# Altium PCB ecg.PcbDoc
Units mm, origin at the board's own origin, x right, y up, seen from the top; angles counter-clockwise.
Board outline 72.9 x 46.1 mm, 2 copper layers (Top Layer, Bottom Layer); 29 components, 18 nets, 75 pads, 21 vias.
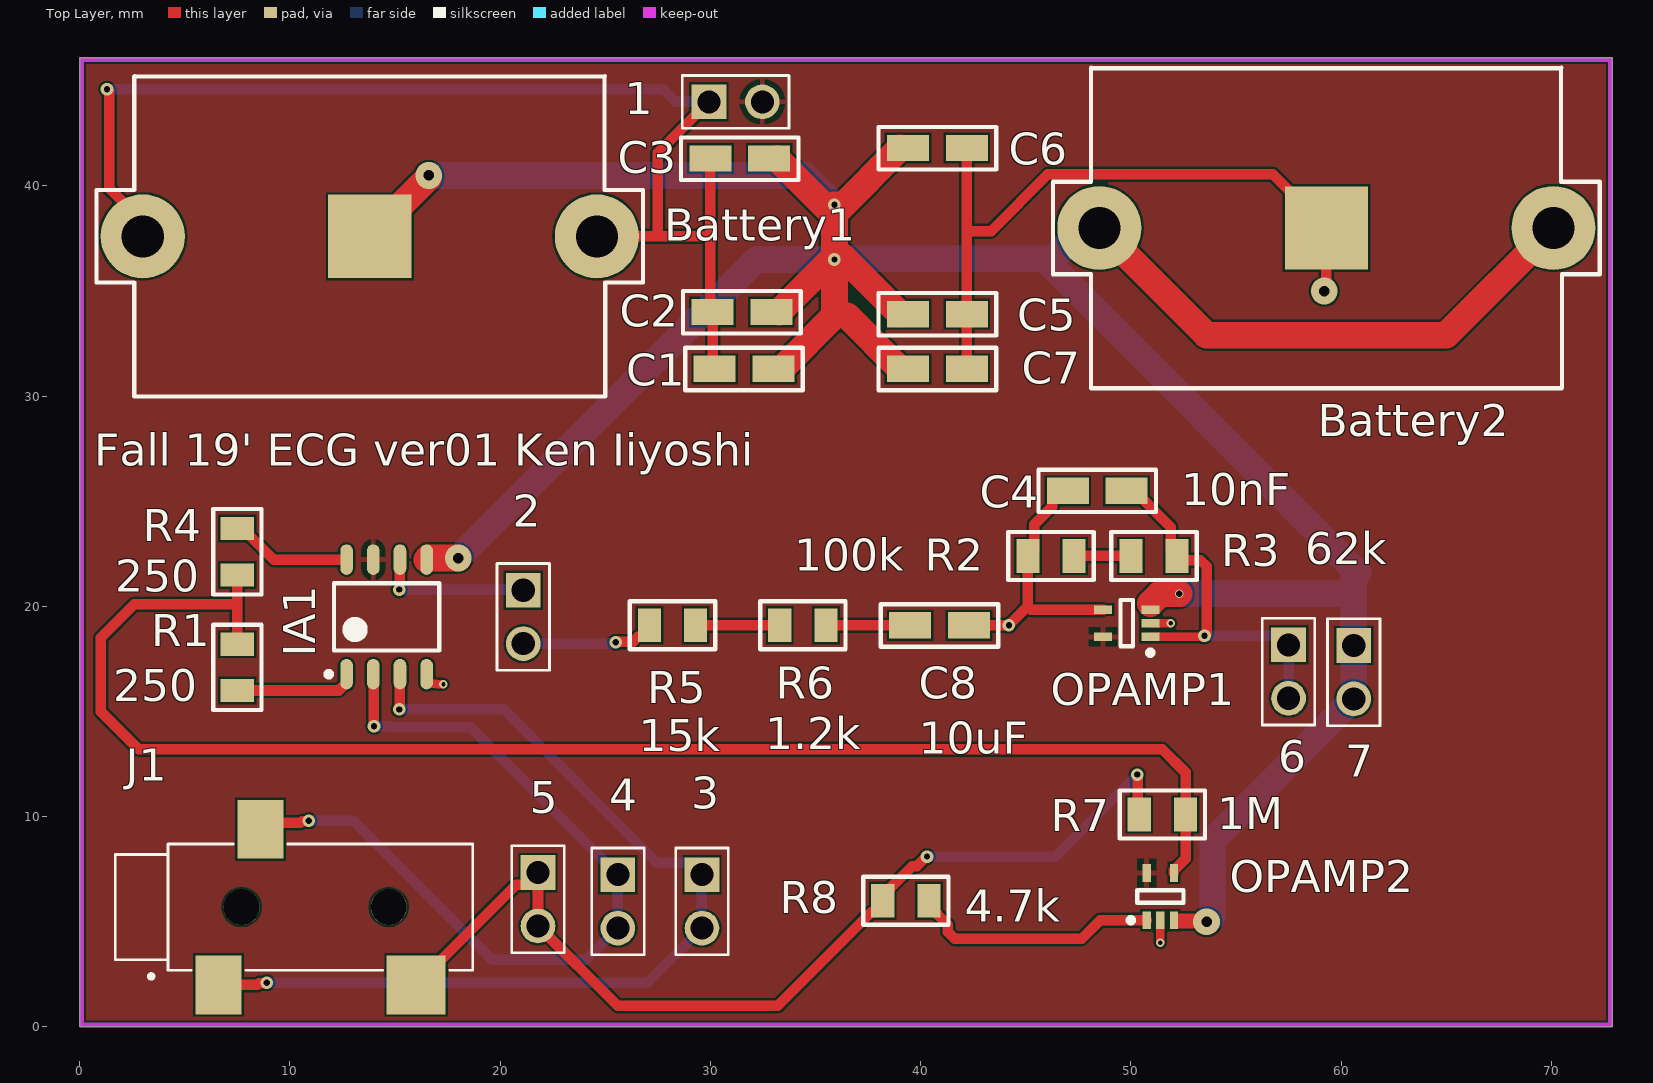
[diagram p0: Top Layer view]
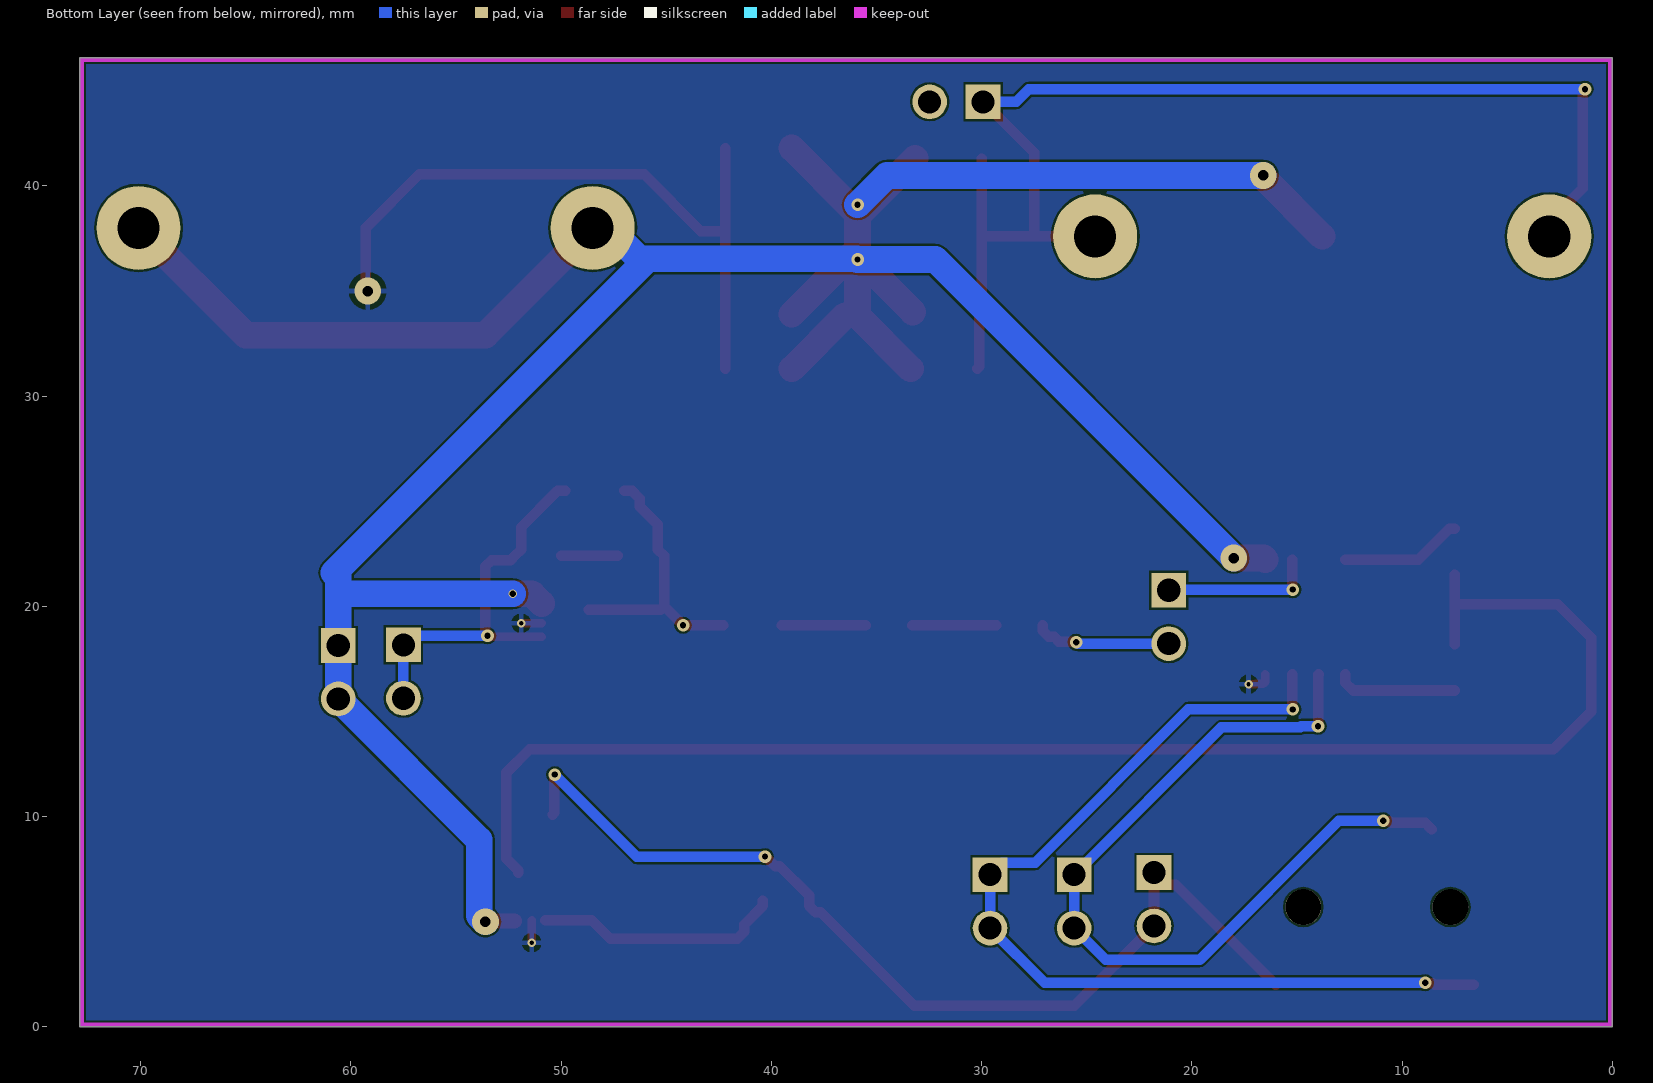
[diagram p1: Bottom Layer view, seen from below]
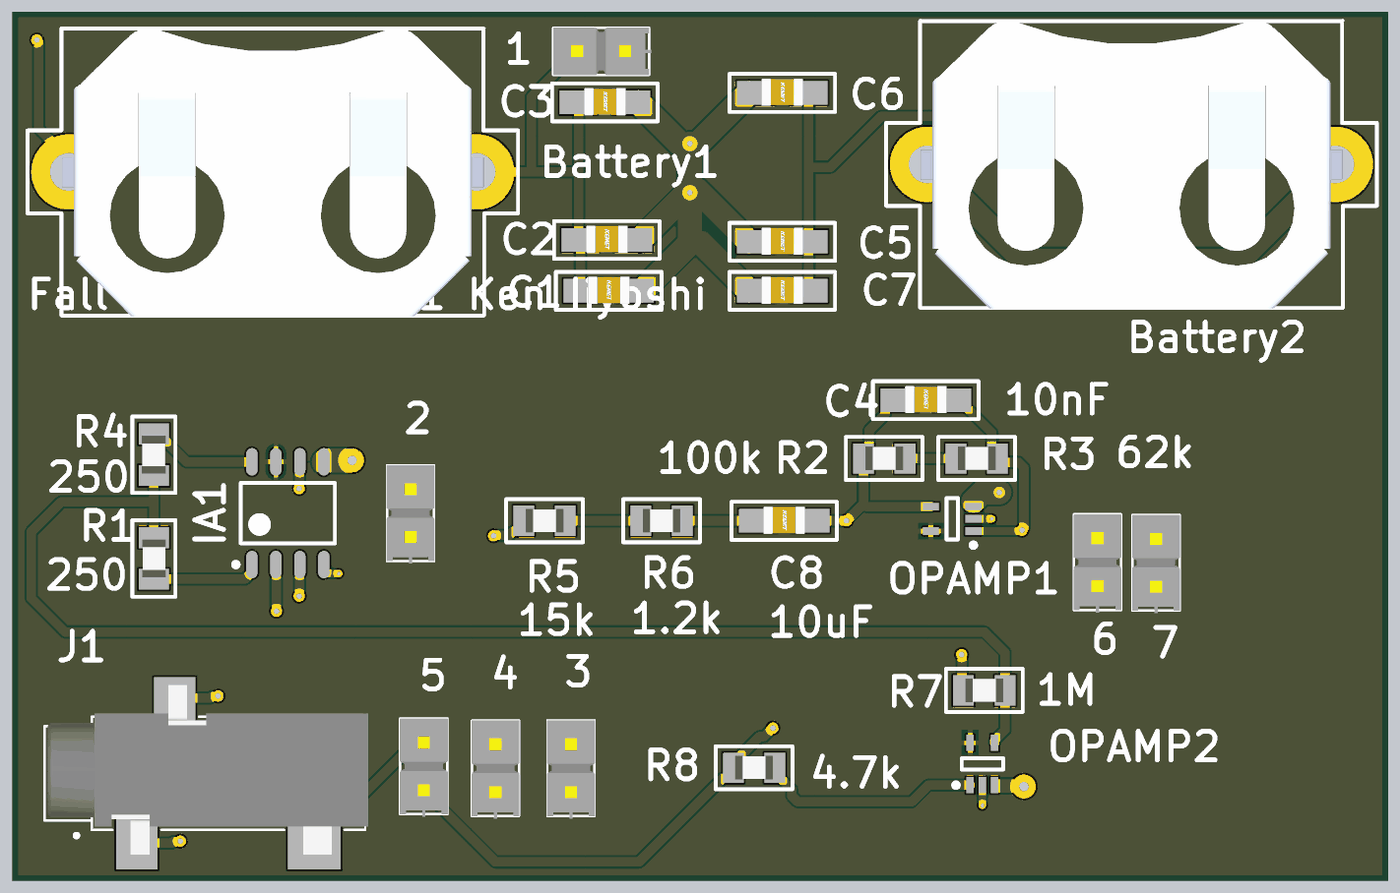
[diagram p2: 3D render of the assembled board from above, using the file's embedded part models]

## Layer stack, top to bottom
Top Solder: solder mask 0.0102, Solder Resist, Dk 3.5
Top Layer: signal copper 0.0356
Dielectric 1: dielectric 0.32, FR-4, Dk 4.8
Bottom Layer: signal copper 0.0356
Bottom Solder: solder mask 0.0102, Solder Resist, Dk 3.5

## Board outline
72.9,0 72.9,46.1 0,46.1 0,0

## Design rules (kind name [scope] priority, off if disabled: settings)
Clearance [All] p1: gap=0.1 ignorepadtopadclearanceinfootprint=FALSE
PolygonConnect [All] p1: connectstyle=Relief reliefconductorwidth=0.254 reliefentries=4 polygonreliefangle="90 Angle" airgapwidth=0.254
RoutingVias [All] p1: holewidth=0.3 width=0.4 viastyle="Through Hole" minholewidth=0.2 minwidth=0.4 maxholewidth=1 maxwidth=1.27
SMDNeckDown [All] p1: percent=500.000
SilkToSilkClearance [All] p1: silktosilkclearance=0.025
SilkToSolderMaskClearance [IsPad] p1: minsilkscreentomaskgap=0.025 clearancetoexposedcopper=TRUE
SolderMaskExpansion [All] p1: expansion=0.102
Width [All] p1: maxlimit=100 minlimit=0.254 preferedwidth=0.254
28 further rules are at their usual default settings.

## Components (designator, comment, footprint, x,y, rotation, side; value= is the part's Value field where it differs from the comment)
1 "2_headers" 3M_961102-6404-AR 31.2,44 r0 top
2 "2_headers" 3M_961102-6404-AR 21.1,19.5 r270 top
3 "2_headers" 3M_961102-6404-AR 29.6,5.97 r270 top
4 "2_headers" 3M_961102-6404-AR 25.6,5.97 r270 top
5 "2_headers" 3M_961102-6404-AR 21.8,6.07 r270 top
6 "2_headers" 3M_961102-6404-AR 57.5,16.9 r270 top
7 "2_headers" 3M_961102-6404-AR 60.6,16.87 r270 top
Battery1 "3V Battery" "Battery Retainer" 13.8,37.6 r0 top
Battery2 "3V Battery" "Battery Retainer" 59.3,38 r0 top
C1 "1 nF" Capacitor 31.6,31.3 r0 top
C2 "100 nF" Capacitor 31.5,34 r0 top
C3 "10 uF" Capacitor 31.4,41.3 r0 top
C4 "10 nF" Capacitor 48.4,25.5 r0 top
C5 "100 nF" Capacitor 40.8,33.9 r0 top
C6 "10 uF" Capacitor 40.8,41.8 r0 top
C7 "1 nF" Capacitor 40.8,31.3 r0 top
C8 "10 uF" Capacitor 40.9,19.1 r0 top
IA1 "provided IA" SOIC127P600X175-8N 14.6,19.5 r90 top
J1 "Audio Jack" CUI_SJ-3523-SMT-TR 7.7,5.7 r0 top
OPAMP1 "provided opamp" SOT65P210X110-5N 49.8,19.2 r180 top
OPAMP2 "provided opamp" SOT65P210X110-5N 51.4,6.2 r90 top
R1 "250 Ohms" Resistor 7.5,17.1 r270 top
R2 "100 kOhms" Resistor 46.2,22.4 r0 top
R3 "62 kOhms" Resistor 51.1,22.4 r0 top
R4 "250 Ohms" Resistor 7.5,22.6 r90 top
R5 "15 kOhms" Resistor 28.2,19.1 r0 top
R6 "1.2 kOhms" Resistor 34.4,19.1 r0 top
R7 "1 MOhms" Resistor 51.5,10.1 r0 top
R8 "4.7 kOhms" Resistor 39.3,6 r0 top

## Footprints (in the part's own frame and the unit in brackets; to place one, negate y for a bottom-side part, rotate by r counter-clockwise, add the part's x,y. Pads: shape width x height; smd on the part's side, far side on the other; paste and mask are expansions set on the pad)
3M_961102-6404-AR [mm]
  rect 1.65x1.65 hole 1.1: 1(-1.27,0)
  round 1.65 hole 1.1: 2(1.27,0)
  silkscreen extent -2.54,-1.25 2.54,1.25, body extent -2.54,-1.27 2.67,1.27, height 7.89
"Battery Retainer" [mm]
  round 4 hole 2: 1(-10.8,0) 1(10.8,0)
  rect 3.96x3.96 smd: 2(0,0)
  silkscreen extent -13,-7.62 13,7.62, body extent -11.18,-7.67 11.17,7.62, height 4.27
Capacitor [mm]
  rect 2x1.25 smd: 1(-1.397,0) 2(1.397,0)
  silkscreen extent -2.8,-1.02 2.79,1, body extent -1.1,-0.7 1.1,0.75, height 0.89
CUI_SJ-3523-SMT-TR [mm] "SJ-352x-SMT"
  rect 2.2x2.8 smd: 1(-1.1,-3.7) 3(0.9,3.7)
  rect 2.8x2.8 smd: 2(8.3,-3.7)
  round 1.7 hole 1.7 unplated: None(0,0) None(7,0)
  silkscreen extent -6,-3.4 11,3, body extent -5.83,-4.32 11.17,4.68, height 5.01
Resistor [mm]
  rect 1.1x1.6 smd: 1(-1.1,0) 2(1.1,0)
  silkscreen extent -2.03,-1.14 2.03,1.14, body extent -1,-0.63 1,0.64, height 0.47
SOIC127P600X175-8N [mm] "SOIC, 8-Leads, Body 4.90x3.90mm, Pitch 1.27mm, IPC Medium Density"
  oval 1.45x0.6 smd: 1(-2.725,1.905) 2(-2.725,0.635) 3(-2.725,-0.635) 4(-2.725,-1.905) 5(2.725,-1.905) 6(2.725,-0.635) 7(2.725,0.635) 8(2.725,1.905)
  silkscreen extent -2.85,-2.5 1.6,2.88, body extent -2,-2.5 2,2.5, height 1.75
SOT65P210X110-5N [mm] "SOT23, 5-Leads, Body 2.00x2.10mm, Pitch 0.65mm, IPC Medium Density"
  rect 0.85x0.4 smd: 1(-1.125,0.65) 2(-1.125,0) 3(-1.125,-0.65) 4(1.125,-0.65) 5(1.125,0.65)
  silkscreen extent -1.25,-1.1 0.3,1.52, body extent -0.7,-1.07 0.7,1.08, height 1.1

## Part data
1 2 3 4 5 6 7: library part 961102-6404-AR, "BOARD TO BOARD, HEADER, 2POS, 1ROW; Series: 961; Pitch Spacing: 2.54mm; No. of Row", Package=None, Digi-Key_Part_Number=3M9457-02-ND, Digi-Key_Purchase_URL=https://www.digikey.com/product-detail/en/3m/961102-6404-AR/3M9457-02-ND/7104633?utm_source=snapeda&utm_medium=aggregator&utm_campaign=symbol, MF=3M, MP=961102-6404-AR, SnapEDA_Link=https://www.snapeda.com/parts/961102-6404-AR/3M%20%28TC%29/view-part/?ref=snap
Battery1 Battery2: library part BC-2003-G-TR, "Battery Retainer Coin, 20.0mm 1 Cell SMD (SMT) Tab", Manufacturer 1="Memory Protection Devices", Supplier Part Number 1=BC-2003-G-TR-CT-ND, Manufacturer Part Number 1=BC-2003-G-TR, Pricing 1="1=0.95000, 10=0.80500, 100=0.66510, 500=0.57498 (USD)", RoHS=No, Stock 1=4670, Supplier 1=Digi-Key
C1 C2 C3 C4 C5 C6 C7 C8: library part 08051A300JAT2A, "CAP CER 30PF 100V C0G/NP0 0805", Capacitance=30pF, Case/Package=0805, Case Code (Metric)=2012, Dielectric=C0G, Dielectric Material=Ceramic, Manufacturer 1="Kyocera AVX", Max Operating Temperature=125°C, Min Operating Temperature=-55°C, Package Quantity=4000, Supplier Part Number 1=478-3738-1-ND, Temperature Coefficient=30ppm/°C, Tolerance=5%, Voltage=100V, Case Code (Imperial)=0805, Category=Capacitors, ComponentLink1Description=https://datasheet.ciiva.com/151/ccog-151426.pdf?src-supplier=Digi-Key, ComponentLink1URL=https://datasheet.ciiva.com/151/ccog-151426.pdf?src-supplier=Digi-Key, ComponentLink2Description=https://datasheet.ciiva.com/151/ccog-151427.pdf?src-supplier=Digi-Key, ComponentLink2URL=https://datasheet.ciiva.com/151/ccog-151427.pdf?src-supplier=Digi-Key, ComponentLink3Description=https://datasheet.ciiva.com/151/ccog-151428.pdf?src-supplier=Digi-Key, ComponentLink3URL=https://datasheet.ciiva.com/151/ccog-151428.pdf?src-supplier=Digi-Key, ComponentLink4Description=https://datasheet.ciiva.com/7811/425357-7811893.pdf?src-supplier=Element14, ComponentLink4URL=https://datasheet.ciiva.com/7811/425357-7811893.pdf?src-supplier=Element14, ComponentLink5Description=https://datasheet.ciiva.com/7812/759117-7812312.pdf?src-supplier=Element14, ComponentLink5URL=https://datasheet.ciiva.com/7812/759117-7812312.pdf?src-supplier=Element14, ComponentLink6Description=https://datasheet.ciiva.com/16215/ccog-16215624.pdf?src-supplier=Future+Electronics, ComponentLink6URL=https://datasheet.ciiva.com/16215/ccog-16215624.pdf?src-supplier=Future+Electronics, ComponentLink7Description=https://datasheet.ciiva.com/17492/ccog-17492712.pdf?src-supplier=Avnet+Europe, ComponentLink7URL=https://datasheet.ciiva.com/17492/ccog-17492712.pdf?src-supplier=Avnet+Europe, ComponentLink8Description=https://datasheet.ciiva.com/14596/70001039-14596892.pdf?src-supplier=Allied+Electronics, ComponentLink8URL=https://datasheet.ciiva.com/14596/70001039-14596892.pdf?src-supplier=Allied+Electronics, ComponentLink9Description=https://datasheet.ciiva.com/6013/425357-6013631.pdf?src-supplier=Farnell, ComponentLink9URL=https://datasheet.ciiva.com/6013/425357-6013631.pdf?src-supplier=Farnell, Depth=1.25mm, Height=0.71mm, Lead Free="Lead Free", Length=2.01mm, Manufacturer Part Number 1=08051A300JAT2A, Mount="Surface Mount,PCB", Number of Pins=2, Packaging="Tape and Reel", Pricing 1="1=0.29000, 10=0.19900, 100=0.10090, 500=0.06906, 1000=0.06110 (USD)", Radiation Hardening=No, REACH SVHC="No SVHC", RoHS=Yes, Stock 1=108048, Supplier 1=Digi-Key, Termination=SMD/SMT, Thickness=0.037inch, Voltage Rating=100V, Voltage Rating (DC)=100V, Width=1.25mm
IA1: library part AD620ARZ-REEL7, "IC OPAMP INSTR 1MHZ 8SOIC", Case/Package=SOIC, Dual Supply Voltage=15V, Input Bias Current=500pA, Input Offset Voltage (Vos)=30mV, Input Resistance=10GR, Manufacturer 1="Analog Devices", Max Dual Supply Voltage=18V, Max Operating Temperature=125°C, Max Power Dissipation=650mW, Min Dual Supply Voltage=2.3V, Min Operating Temperature=-55°C, Min Supply Voltage=4.6V, Nominal Supply Current=900uA, Operating Supply Current=1.3mA, Output Current per Channel=18mA, Package Quantity=1, Power Supply Rejection Ratio (PSRR)=140dB, Supplier Part Number 1=AD620ARZ-REEL7CT-ND, -3db Bandwidth=1MHz, Bandwidth=800kHz, Common Mode Rejection Ratio=93dB, ComponentLink1Description=https://datasheet.ciiva.com/15128/getdatasheetpartid-88990-15128224.pdf?src-supplier=Verical, ComponentLink1URL=https://datasheet.ciiva.com/15128/getdatasheetpartid-88990-15128224.pdf?src-supplier=Verical, ComponentLink2Description=https://datasheet.ciiva.com/1579/26155-1579655.pdf?src-supplier=Newark, ComponentLink2URL=https://datasheet.ciiva.com/1579/26155-1579655.pdf?src-supplier=Newark, ComponentLink3Description=https://datasheet.ciiva.com/26847/ad620arz-reel7-26847213.pdf?src-supplier=IIIC, ComponentLink3URL=https://datasheet.ciiva.com/26847/ad620arz-reel7-26847213.pdf?src-supplier=IIIC, ComponentLink4Description=https://datasheet.ciiva.com/2976/ad620-2976391.pdf?src-supplier=Avnet, ComponentLink4URL=https://datasheet.ciiva.com/2976/ad620-2976391.pdf?src-supplier=Avnet, ComponentLink5Description=https://datasheet.ciiva.com/1794/ad620-1794712.pdf?src-supplier=Digi-Key, ComponentLink5URL=https://datasheet.ciiva.com/1794/ad620-1794712.pdf?src-supplier=Digi-Key, ComponentLink6Description=https://datasheet.ciiva.com/1794/ad620-1794713.pdf?src-supplier=Digi-Key, ComponentLink6URL=https://datasheet.ciiva.com/1794/ad620-1794713.pdf?src-supplier=Digi-Key, ComponentLink7Description=https://datasheet.ciiva.com/1794/ad620-1794714.pdf?src-supplier=Digi-Key, ComponentLink7URL=https://datasheet.ciiva.com/1794/ad620-1794714.pdf?src-supplier=Digi-Key, ComponentLink8Description=https://datasheet.ciiva.com/2975/ad620-2975599.pdf?src-supplier=Avnet, ComponentLink8URL=https://datasheet.ciiva.com/2975/ad620-2975599.pdf?src-supplier=Avnet, ComponentLink9Description=https://datasheet.ciiva.com/48709/001248702-da-01-en-ic-amp-inst-lp-ad620arz-reel7-soic-8-adi-48709622.pdf?src-supplier=Conrad, ComponentLink9URL=https://datasheet.ciiva.com/48709/001248702-da-01-en-ic-amp-inst-lp-ad620arz-reel7-soic-8-adi-48709622.pdf?src-supplier=Conrad, Contact Plating=Tin,Matte, Lead Free="Contains Lead", Manufacturer Part Number 1=AD620ARZ-REEL7, Mount="Surface Mount", Number of Channels=1, Number of Circuits=1, Number of Elements=1, Number of Pins=8, Operating Supply Voltage=18V, Packaging="Tape and Reel", Power Dissipation=650mW, Pricing 1="1=9.81000, 10=8.85800, 25=8.44600, 100=7.33360, 250=7.00400 (USD)", Radiation Hardening=No, RoHS=Yes, Slew Rate=1.2V/µs, Stock 1=12581, Supplier 1=Digi-Key
J1: library part SJ-3523-SMT-TR, "SJ-352x-SMT CONN JACK STEREO 3.5MM SMD R/A", Category="Connectors, Interconnects"
OPAMP1 OPAMP2: library part TLV521DCKT, "IC OP AMP 6KHZ RR SC-70-5", Case/Package=SC, Input Bias Current=1pA, Input Offset Voltage (Vos)=100uV, Manufacturer 1="Texas Instruments", Max Operating Temperature=125°C, Min Operating Temperature=-40°C, Operating Supply Current=350nA, Output Current per Channel=12mA, Supplier Part Number 1=296-44482-1-ND, Bandwidth=6kHz, ComponentLink1Description=http://www.ti.com/general/docs/lit/getliterature.tsp?genericPartNumber=TLV521&&fileType=pdf&src-supplier=Element14, ComponentLink1URL=http://www.ti.com/general/docs/lit/getliterature.tsp?genericPartNumber=TLV521&&fileType=pdf&src-supplier=Element14, ComponentLink2Description=http://www.ti.com/lit/pdf/slyt701?src-supplier=Digi-Key, ComponentLink2URL=http://www.ti.com/lit/pdf/slyt701?src-supplier=Digi-Key, ComponentLink3Description=http://www.ti.com/lit/ds/symlink/tlv521.pdf?src-supplier=Digi-Key, ComponentLink3URL=http://www.ti.com/lit/ds/symlink/tlv521.pdf?src-supplier=Digi-Key, ComponentLink4Description=http://www.ti.com/general/docs/lit/getliterature.tsp?genericPartNumber=TLV521&amp;&amp;fileType=pdf&src-supplier=Farnell, ComponentLink4URL=http://www.ti.com/general/docs/lit/getliterature.tsp?genericPartNumber=TLV521&amp;&amp;fileType=pdf&src-supplier=Farnell, Gain Bandwidth Product=6kHz, Lead Free="Lead Free", Manufacturer Part Number 1=TLV521DCKT, Mount="Surface Mount", Number of Amplifiers=1, Number of Channels=1, Number of Circuits=1, Number of Pins=5, Packaging="Cut Tape", Pricing 1="1=0.64000, 10=0.54800, 100=0.40950 (USD)", REACH SVHC="No SVHC", RoHS=Yes, Slew Rate=2.5V/µs, Stock 1=7572, Supplier 1=Digi-Key
R1 R2 R3 R4 R5 R6 R7 R8: library part CRCW0805360RFKEA, "RES SMD 360 OHM 1% 1/8W 0805", Case/Package=0805, Case Code (Metric)=2012, Manufacturer 1=Vishay, Max Operating Temperature=155°C, Max Power Dissipation=125mW, Min Operating Temperature=-55°C, Package Quantity=10, Resistance=360R, Supplier Part Number 1=541-360CCT-ND, Temperature Coefficient=100ppm/°C, Tolerance=1%, Voltage Rating=150V, Case Code (Imperial)=0805, Category=Resistors, ComponentLink1Description=https://datasheet.ciiva.com/11812/0900766b80d98b26-11812609.pdf?src-supplier=RSComponents, ComponentLink1URL=https://datasheet.ciiva.com/11812/0900766b80d98b26-11812609.pdf?src-supplier=RSComponents, ComponentLink2Description=https://datasheet.ciiva.com/7881/1697337-7881957.pdf?src-supplier=Element14, ComponentLink2URL=https://datasheet.ciiva.com/7881/1697337-7881957.pdf?src-supplier=Element14, ComponentLink3Description=https://datasheet.ciiva.com/7881/1697337-7881958.pdf?src-supplier=Element14, ComponentLink3URL=https://datasheet.ciiva.com/7881/1697337-7881958.pdf?src-supplier=Element14, ComponentLink4Description=https://datasheet.ciiva.com/8942/dcrcwe3-8942598.pdf?src-supplier=Avnet, ComponentLink4URL=https://datasheet.ciiva.com/8942/dcrcwe3-8942598.pdf?src-supplier=Avnet, ComponentLink5Description=https://datasheet.ciiva.com/22674/1847332-22674713.pdf?src-supplier=Element14, ComponentLink5URL=https://datasheet.ciiva.com/22674/1847332-22674713.pdf?src-supplier=Element14, ComponentLink6Description=https://datasheet.ciiva.com/2467/dcrcwe3-2467773.pdf?src-supplier=Digi-Key, ComponentLink6URL=https://datasheet.ciiva.com/2467/dcrcwe3-2467773.pdf?src-supplier=Digi-Key, ComponentLink7Description=https://datasheet.ciiva.com/2467/dcrcwe3-2467774.pdf?src-supplier=Digi-Key, ComponentLink7URL=https://datasheet.ciiva.com/2467/dcrcwe3-2467774.pdf?src-supplier=Digi-Key, ComponentLink8Description=https://datasheet.ciiva.com/5543/dcrcwe3-109170-5543710.pdf?src-supplier=Mouser, ComponentLink8URL=https://datasheet.ciiva.com/5543/dcrcwe3-109170-5543710.pdf?src-supplier=Mouser, ComponentLink9Description=https://datasheet.ciiva.com/2467/dcrcwe3-2467775.pdf?src-supplier=Digi-Key, ComponentLink9URL=https://datasheet.ciiva.com/2467/dcrcwe3-2467775.pdf?src-supplier=Digi-Key, Composition="Thick Film", Contact Plating=Tin, Depth=1.25mm, Features="Automotive AEC-Q200", Height=0.45mm, Lead Free="Lead Free", Length=2mm, Manufacturer Part Number 1=CRCW0805360RFKEA, Military Standard=Not, Number of Pins=2, Number of Terminations=2, Packaging="Tape and Reel", Power Rating=125mW, Pricing 1="1=0.10000, 10=0.06600, 100=0.02670, 1000=0.01199, 2500=0.01041 (USD)", Radiation Hardening=No, REACH SVHC=Unknown, RoHS=Yes, Stock 1=17639, Supplier 1=Digi-Key, Termination=SMD/SMT, Voltage Rating (DC)=150V, Weight=0.000194oz, Width=0.049inch

## Via types
v1: diameter 0.6, hole 0.3, Top Layer to Bottom Layer, 13 vias
v2: diameter 1.27, hole 0.5, Top Layer to Bottom Layer, 4 vias
v3: diameter 0.4, hole 0.2, Top Layer to Bottom Layer, 3 vias
v4: diameter 0.4, hole 0.3, Top Layer to Bottom Layer, 1 vias

## Nets (pads, with @x,y where several pads share a name; then routed paths per layer and width w, separated by ;. In a path a pad name is that pad's centre, name@x,y a point inside that pad or via, vN(x,y) a via of type N, cw(c..) or ccw(c..) an arc to the next point about the centre after c; other vN are vias at no path point)
GND: 7.1 7.2 Battery1.2 Battery2.1 C1.2 C2.2 C3.2 C5.1 C6.1 C7.1 IA1.5 OPAMP1.3 OPAMP2.3 | length 171.4
  Top Layer w0.5: C3.2 C3.2@33.172,41.3 ; C2.2 C2.2@33.272,34 ; C1.2 C1.2@33.372,31.3 ; 35.9,33.828 36.5,33.828 ; v1@35.9,36.628 36.3,36.628 ; C7.1@39.028,31.3 C7.1 ; C5.1@39.028,33.9 C5.1 ; C6.1@39.028,41.8 C6.1
  Top Layer w0.7: OPAMP2.3@52.2,5.037 53.563,5.037 v2(53.6,5)
  Top Layer w1.27: Battery1.2 16.6,40.4 v2(16.6,40.5) ; IA1.5 16.58,22.3 v2(18,22.3) ; C3.2@33.172,41.3 35.636,38.836 ; C2.2@33.272,34 v1@35.836,36.564 ; C1.2@33.372,31.3 35.9,33.828 v1(35.9,36.5) 35.9,36.628 35.9,38.672 ; v1(35.9,39.1) 35.9,38.672 ; 36.3,36.628 C5.1@39.028,33.9 ; 36.5,33.828 C7.1@39.028,31.3 ; C6.1@39.028,41.8 36.114,38.886 35.9,38.672 ; Battery2.1@48.5,38 53.6,32.9 65,32.9 Battery2.1@70.1,38 ; 50.925,20.135 51.39,20.6 v4(52.3,20.6)
  Bottom Layer w1.27: v2(16.6,40.5) 34.5,40.5 v1(35.9,39.1) ; v2(18,22.3) 32.2,36.5 v1(35.9,36.5) 35.943,36.543 45.857,36.543 ; Battery2.1@48.5,38 47.761,38 46.304,36.543 45.857,36.543 ; v4(52.3,20.6) 60.6,20.6 ; v2(53.6,5) 53.9,5.3 53.9,8.9 7.2 7.1 60.6,20.6 ; 45.857,36.543 60.8,21.6 60.6,21.4 60.6,20.6
Net1_1: 1.1 Battery1.1 C1.1 C2.1 C3.1 | length 59.5
  Top Layer w0.5: v1(1.3,44.6) 1.4,44.5 1.4,39.889 3,38.289 Battery1.1@3,37.6 ; Battery1.1@24.6,37.6 27.5,37.6 ; 1.1 27.5,41.57 27.5,37.6 ; C3.1 30.003,37.5 ; C1.1 30.103,31.4 C2.1 30.003,34.1 30.003,37.5 ; 27.5,37.6 29.903,37.6 30.003,37.5
  Bottom Layer w0.5: v1(1.3,44.6) 27.755,44.6 28.355,44 1.1
Net1_2: 1.2 IA1.7 OPAMP1.5 OPAMP2.5
Net2_1: 2.1 IA1.6 | length 7.4
  Top Layer w0.5: v1(15.2,20.8) 15.216,20.816 15.216,22.206 IA1.6
  Bottom Layer w0.5: v1(15.2,20.8) 21.07,20.8 2.1
Net2_2: 2.2 R5.1 | length 6.5
  Top Layer w0.5: v1(25.5,18.3) 25.519,18.319 26.319,18.319 26.55,18.55 26.8,18.55 27.1,18.85 R5.1
  Bottom Layer w0.5: 2.2 25.43,18.23 v1(25.5,18.3)
Net3_1: 3.1 3.2 IA1.3 J1.1 | length 46
  Top Layer w0.5: J1.1 8.45,2 8.531,2.081 8.881,2.081 v1(8.9,2.1) ; v1(15.2,15.1) 15.218,15.118 15.218,16.757 IA1.3
  Bottom Layer w0.5: v1(8.9,2.1) 27,2.1 3.2 3.1 29.025,7.815 27.453,7.815 20.168,15.1 v1(15.2,15.1)
Net4_1: 4.1 4.2 IA1.2 J1.3 | length 40.1
  Top Layer w0.5: J1.3 8.9,9.7 10.5,9.7 10.581,9.781 10.881,9.781 v1(10.9,9.8) ; IA1.2 13.983,16.758 13.983,14.318 v1(14,14.3)
  Bottom Layer w0.5: v1(10.9,9.8) 13.014,9.8 19.614,3.2 24.1,3.2 4.2 4.1 18.59,14.25 14.848,14.25 14.798,14.3 v1(14,14.3)
Net5_1: 5.1 5.2 J1.2 R7.1 R8.1 | length 47.4
  Top Layer w0.5: J1.2 20.765,6.765 21.225,6.765 5.1 5.2 25.6,1 33.2,1 37.65,5.45 37.9,5.45 38.2,5.75 R8.1 38.2,6.25 39.6,7.65 39.823,7.65 40.273,8.1 v1(40.3,8.1) ; v1(50.3,12) 50.319,11.981 50.319,10.181 R7.1
  Bottom Layer w0.5: v1(40.3,8.1) 46.4,8.1 v1(50.3,12)
Net6_1: 6.1 6.2 C4.2 OPAMP1.1 R3.2 | length 18.6
  Top Layer w0.4: OPAMP1.1 v1@53.45,18.55
  Top Layer w0.5: C4.2 50.172,25.5 51.9,23.772 51.9,22.7 R3.2 52.4,22.2 53.307,22.2 53.6,21.907 53.6,18.7 v1(53.5,18.6) v1@53.45,18.55
  Bottom Layer w0.5: v1(53.5,18.6) 57.07,18.6 6.1 6.2
NetBattery2_2: Battery2.2 C5.2 C6.2 C7.2 IA1.4 OPAMP1.2 OPAMP2.2 | length 36.1
  Top Layer w0.4: IA1.4 16.505,16.404 16.597,16.312 16.968,16.312 16.98,16.3 v3(17.3,16.3) ; OPAMP1.2 v3(51.9,19.2) ; v3(51.4,4) OPAMP2.2
  Top Layer w0.5: C7.2 C5.2 42.197,37.85 ; C6.2 42.197,37.85 ; v2(59.2,35) 59.3,35.1 Battery2.2 56.75,40.55 46.05,40.55 43.35,37.85 42.197,37.85
NetC4_1: C4.1 C8.2 OPAMP1.4 R2.1 | length 13.3
  Top Layer w0.5: C8.2 44.1,19.1 v1(44.2,19.1) 45.1,20 ; C4.1 46.628,25.5 46.253,25.125 46.253,24.75 45.4,23.897 45.4,22.7 R2.1 45.1,20 ; OPAMP1.4 45.25,19.85 45.1,20
NetC8_1: C8.1 R6.2 | length 4
  Top Layer w0.5: R6.2 C8.1
NetIA1_1: IA1.1 R1.2 | length 5.7
  Top Layer w0.5: R1.2 12.318,16 12.695,16.377 IA1.1
NetIA1_8: IA1.8 R4.2 | length 5.8
  Top Layer w0.5: R4.2 7.75,23.7 9.225,22.225 IA1.8
NetOPAMP2_1: OPAMP2.1 R8.2 | length 11.8
  Top Layer w0.5: R8.2 40.4,5.75 41.296,4.854 41.296,4.518 41.618,4.196 47.66,4.196 48.539,5.075 OPAMP2.1
NetOPAMP2_4: OPAMP2.4 R1.1 R4.1 R7.2 | length 71.8
  Top Layer w0.5: R1.1 7.5,20.1 ; R4.1 7.5,20.1 ; OPAMP2.4 52.05,7.45 52.6,8 R7.2 52.6,12.1 51.5,13.2 2.8,13.2 1,15 1,18.5 2.6,20.1 7.5,20.1
NetR2_2: R2.2 R3.1 | length 2.7
  Top Layer w0.5: R2.2 R3.1
NetR5_2: R5.2 R6.1 | length 4
  Top Layer w0.5: R5.2 R6.1
pads on no net: J1.None

## Polygon pours and split planes (outlines as drawn)
Net1_2 on Top Layer (solid, pour order 20): 0.3,45.8 0.3,0.3 72.6,0.3 72.6,45.8
no net on Top Layer "Top Layer-No Net" (solid, pour order 4): -10.3,72.1
no net on Top Layer "Top Layer-No Net 1" (solid, pour order 2): -4.8,69.9
no net on Top Layer "Top Layer-No Net 2" (solid, pour order 0): 1.1,-0.3
Net1_2 on Mechanical 16 (solid): 0.4,45.8
NetBattery2_2 on Bottom Layer (solid, pour order 24): 0.3,45.8 0.3,0.3 72.6,0.3 72.6,45.8

## Keep-outs
Keep-Out Layer:
  lines w0.2: 0.1,0.1 0.1,46 72.8,46 72.8,0.1 0.1,0.1

## Silkscreen, mask and mechanical layers (free items; w line width, h text height)
Top Overlay:
  text "Fall 19' ECG ver01 Ken Iiyoshi" at 0.7,26.7 h1.52
  text "10nF" at 52.4,24.8 h1.52
  text "62k" at 58.3,22 h1.52
  text "100k" at 34,21.7 h1.52
  text "250" at 1.7,20.7 h1.52
  text "250" at 1.6,15.5 h1.52
  text "1.2k" at 32.6,13.2 h1.52
  text "15k" at 26.6,13.1 h1.52
  text "10uF" at 39.9,13 h1.52
  text "1M" at 54.1,9.4 h1.52
  text "4.7k" at 42.1,5 h1.52